# EAGLE board Week09_Aleduino(fabduino).brd (EAGLE 6.5.0)
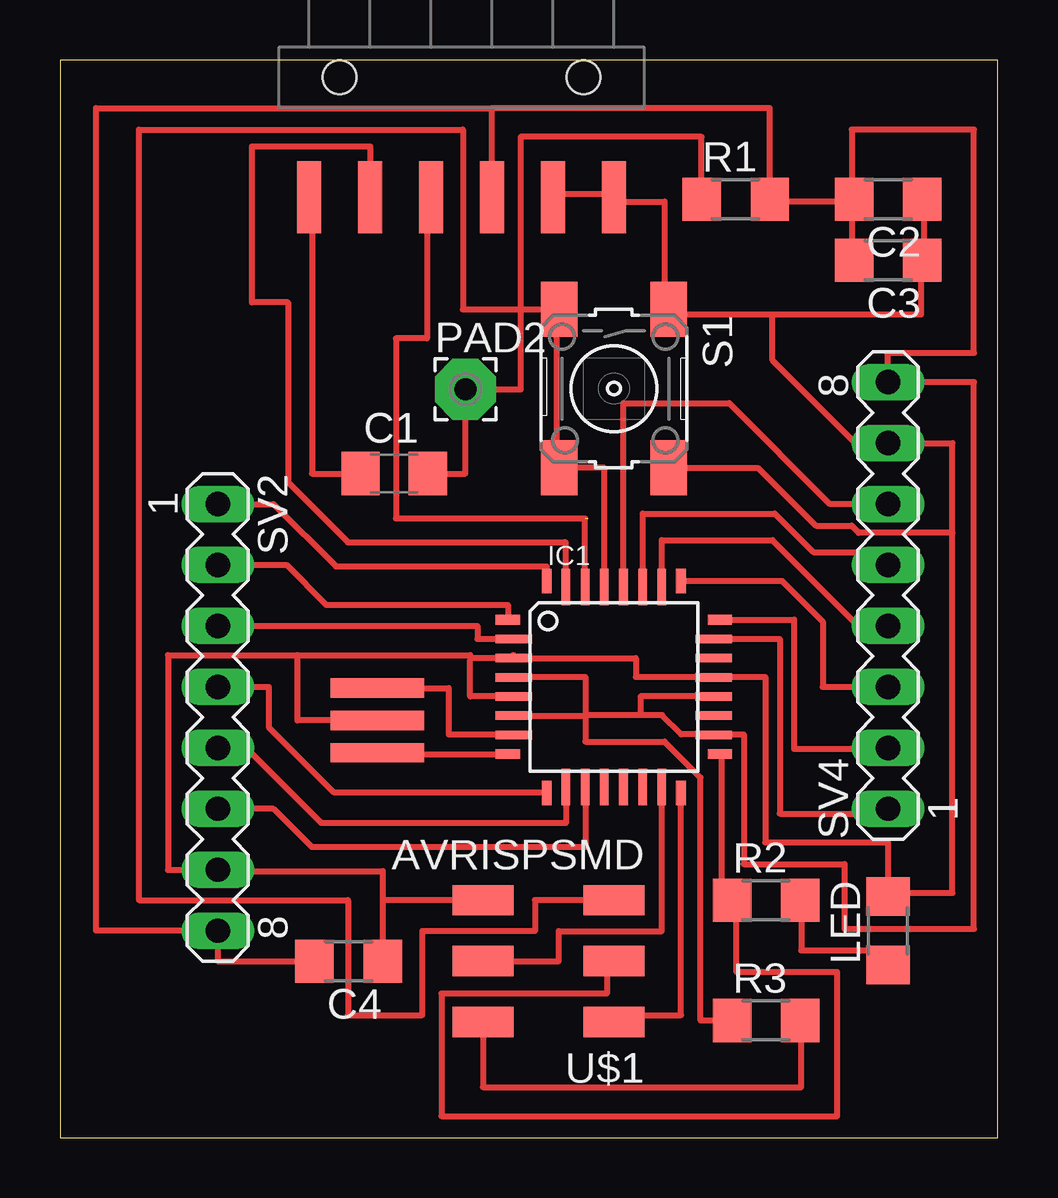
[diagram p0: board, top side]

Size 39.1 x 44.9 mm. Coordinates in mm from the lower left corner, seen from the top.
Outline: 0,0 39.1,0 39.1,44.9 0,44.9 0,0
Copper layers (1*16): Top 0.035mm / dielectric 1.5mm / Bottom 0.035mm
Design rules "default": minimum track width 10mil, minimum drill 24mil, track to track 8mil, track to pad 8mil, pad to pad 8mil, via to via 8mil, smd to smd 8mil, copper to edge 40mil, drill to drill 8mil, minimum pad ring 10mil, minimum via ring 8mil, stop-mask expansion 4mil, vias tented up to drill 0mil, thermal gap 10mil

## Footprints (pad centres in the part's own frame; a part is rotated, then mirrored left to right if it is on the bottom)
C1206 = smd 1.6 x 1.8: 1 -1.4,0; 2 1.4,0
1206 = smd 1.6 x 1.803: 1 -1.422,0; 2 1.422,0
TQFP32-08 = smd 1.016 x 0.406: 1 -4.42,2.8; 8 -4.42,-2.8; 17 4.42,-2.8; 24 4.42,2.8 | smd 1.524 x 0.356: 2 -4.166,2; 3 -4.166,1.2; 4 -4.166,0.4; 5 -4.166,-0.4; 6 -4.166,-1.2; 7 -4.166,-2; 18 4.166,-2; 19 4.166,-1.2; 20 4.166,-0.4; 21 4.166,0.4; 22 4.166,1.2; 23 4.166,2 | smd 0.406 x 1.016: 9 -2.8,-4.42; 16 2.8,-4.42; 25 2.8,4.42; 32 -2.8,4.42 | smd 0.356 x 1.524: 10 -2,-4.166; 11 -1.2,-4.166; 12 -0.4,-4.166; 13 0.4,-4.166; 14 1.2,-4.166; 15 2,-4.166; 26 2,4.166; 27 1.2,4.166; 28 0.4,4.166; 29 -0.4,4.166; 30 -1.2,4.166; 31 -2,4.166
1X06-SMD = smd 1 x 3: 1 -6.35,5; 2 -3.81,5; 3 -1.27,5; 4 1.27,5; 5 3.81,5; 6 6.35,5 | hole 1.4: -5.08,0; 5.08,0
2,54/0,9 = drill 0.914 pad 2.54 octagon: 1 0,0
6MM_SWITCH = smd 2.286 x 1.524: 1 -3.302,2.286; 2 3.302,2.286; 3 -3.302,-2.286; 4 3.302,-2.286
MA08-1 = drill 1.016 long: 1 -8.89,0; 2 -6.35,0; 3 -3.81,0; 4 -1.27,0; 5 1.27,0; 6 3.81,0; 7 6.35,0; 8 8.89,0
2X03SMD = smd 2.54 x 1.27: 1 -2.54,2.54; 2 2.92,2.54; 3 -2.54,0; 4 2.92,0; 5 -2.54,-2.54; 6 2.92,-2.54
EFOBM = smd 0.8 x 3.9: 1 -1.35,0; 2 0,0; 3 1.35,0

## Placement (x,y rotation side)
C1  .1uf  [C1206]  13.93,27.67 0 top
C2  1uf  [1206]  34.52,39.1 180 top
C3  .1uf  [1206]  34.52,36.56 180 top
C4  10uf  [1206]  12.03,7.35 180 top
IC1  ATMEGA48/88/168-AU  [TQFP32-08]  23.09,18.78 0 top
JP1  [1X06-SMD]  16.74,44.18 180 top
LED  [1206]  34.52,8.62 90 top
PAD2  WIREPAD2,54/0,9  [2,54/0,9]  16.9,31.18 0 top
R1  10k  [1206]  28.17,39.1 0 top
R2  499  [1206]  29.44,9.89 0 top
R3  10k  [1206]  29.44,4.88 0 top
S1  [6MM_SWITCH]  23.09,31.21 270 top
SV2  [MA08-1]  6.58,17.51 270 top
SV4  [MA08-1]  34.52,22.59 90 top
U$1  AVRISPSMD  [2X03SMD]  20.55,7.35 180 top
U$2  RESONATOREFOB  [EFOBM]  13.23,17.38 90 top

## Library data of the parts
C1 = rcl
C2-C4 LED R1-R3 S1 = ng
IC1 = atmega8
JP1 = SparkFun
PAD2 = wirepad
SV2 SV4 = con-lstb
U$1 = 01_fab
U$2 = fab

## Nets
DTR: C1.1 JP1.6
GND: C2.1 C3.1 C4.1 IC1.3 IC1.5 IC1.21 JP1.1 JP1.2 LED.2 S1.1 S1.2 SV2.7 SV4.7 U$1.6 U$2.2
MISO: IC1.16 U$1.1
MOSI: IC1.15 U$1.4
N$1: IC1.8 U$2.1
N$3: IC1.23 SV4.1
N$4: IC1.24 SV4.2
N$5: IC1.25 SV4.3
N$6: IC1.26 SV4.4
N$7: IC1.27 SV4.5
N$8: IC1.28 SV4.6
N$9: IC1.7 U$2.3
N$10: IC1.32 SV2.1
N$11: IC1.1 SV2.2
N$12: IC1.2 SV2.3
N$13: IC1.9 SV2.4
N$14: IC1.10 SV2.5
N$15: IC1.11 SV2.6
N$16: R3.2 U$1.2
N$23: LED.1 R2.2
RST: C1.2 IC1.29 PAD2.1 R1.1 S1.3 S1.4 U$1.5
RX: IC1.30 JP1.4
SCK: IC1.17 R2.1 U$1.3
TX: IC1.31 JP1.5
VCC: C2.2 C3.2 C4.2 IC1.4 IC1.6 IC1.18 IC1.20 JP1.3 R1.2 R3.1 SV2.8 SV4.8

## Tracks (layer width: path | path; a pad name or v marks a point on that pad's centre or on a via)
DTR
  Top 0.254: JP1.6 10.5,39 10.5,27.67 C1.1
GND
  Top 0.254: 37.2,25.2 33.3,25.2 33,25.5 31.5,25.5 29.09,27.91 S1.2 | C3.1 36,36.6 36,39 C2.1 | 25.2,34.3 25.2,39 23.1,39 JP1.1 22.8,39.3 20.7,39.3 JP1.2 | S1.1 25.2,33.6 25.2,34.3 | 35.7,36.3 C3.1 | 18.9,20.1 IC1.3 | 34.5,10.2 LED.2 | LED.2 34.8,10.2 37.2,10.2 37.2,25.2 | 37.2,25.2 37.2,28.94 SV4.7 33.16,28.94 29.7,32.4 29.7,34.3 | IC1.3 24,19.98 24,19.2 27.26,19.2 IC1.21 27.3,19.2 29.4,19.2 29.4,12.3 34.52,12.3 LED.2 | 9.9,20.1 4.5,20.1 4.5,11.16 SV2.7 6.64,11.1 13.45,11.1 13.45,9.89 | 9.9,20.1 17.1,20.1 17.1,19.98 | U$2.2 9.9,17.38 9.9,20.1 | IC1.5 17.1,18.38 17.1,19.9 17.1,19.98 | 25.2,34.3 29.7,34.3 | 29.7,34.3 35.9,34.3 35.9,36.56 C3.1 | U$1.6 13.45,9.89 | 13.45,9.89 C4.1 | IC1.3 17.1,19.98
MISO
  Top 0.254: U$1.1 23.1,5.1 25.89,5.1 IC1.16
MOSI
  Top 0.254: U$1.4 20.8,7.35 20.8,8.6 25.09,8.6 IC1.15
N$1
  Top 0.254: 18.67,15.9 IC1.8 12.93,15.98 U$2.1
N$3
  Top 0.254: IC1.23 30,20.78 30,13.5 34.52,13.5 SV4.1
N$4
  Top 0.254: IC1.24 30.6,21.58 30.6,16.2 34.52,16.2 SV4.2
N$5
  Top 0.254: 34.52,18.8 SV4.3 31.8,18.78 31.8,21.5 30.1,23.2 IC1.25
N$6
  Top 0.254: IC1.26 25.09,24.9 29.7,24.9 33.2,21.4 34.44,21.4 SV4.4
N$7
  Top 0.254: IC1.27 24.3,23.1 24.3,26 29.8,26 31.4,24.4 33.98,24.4 SV4.5
N$8
  Top 0.254: SV4.6 32.1,26.4 27.9,30.6 23.49,30.6 IC1.28
N$9
  Top 0.254: 18.9,16.8 IC1.7 18.92,16.8 16.2,16.8 16.2,18.73 U$2.3
N$10
  Top 0.254: IC1.32 20.29,23.8 11.5,23.8 8.9,26.4 SV2.1
N$11
  Top 0.254: 18.6,21.6 IC1.1 | SV2.2 9.44,23.86 11.1,22.2 18.67,22.2 IC1.1 | 18.67,21.6 IC1.1 | 18.65,21.6 IC1.1
N$12
  Top 0.254: SV2.3 17.4,21.32 17.4,20.78 IC1.2
N$13
  Top 0.254: SV2.4 8.7,18.78 8.7,17.1 11.4,14.4 20.25,14.4 IC1.9
N$14
  Top 0.254: SV2.5 7.76,16.24 10.9,13.1 21.09,13.1 IC1.10
N$15
  Top 0.254: IC1.11 21.9,14.4 21.9,12.1 10.5,12.1 8.9,13.7 SV2.6
N$16
  Top 0.254: U$1.2 17.63,2.1 30.9,2.1 30.9,4.88 R3.2
N$23
  Top 0.254: 34.2,7.2 34.5,7.2 LED.1 34.2,7.2 34.2,7.8 30.9,7.8 30.9,9.6 R2.2
RST
  Top 0.254: 26.7,39.3 R1.1 26.75,41.7 19.2,41.7 19.2,34.51 | 20.7,33.6 S1.3 | S1.3 20.7,33.3 20.7,27 S1.4 22.69,27.91 IC1.29 | 20.8,33.6 S1.3 | C1.2 16.9,27.67 PAD2.1 19.2,31.18 19.2,34.51 | U$1.5 19.8,9.89 19.8,8.6 15.1,8.6 15.1,5.1 12,5.1 12,9.9 3.3,9.9 3.3,42 16.8,42 16.8,34.51 19.2,34.51 | 19.2,34.51 S1.3
RX  (1 unrouted)
  Top 0.254: 21.9,23.1 IC1.30 21.89,25.8 14,25.8 14,33.3 15.3,33.3 15.3,39 JP1.4
SCK
  Top 0.254: IC1.17 27.6,15.9 27.6,9.9 27.9,9.9 R2.1 | U$1.3 22.8,7.2 22.8,6 15.9,6 15.9,0.9 32.4,0.9 32.4,6.9 28.2,6.9 28.2,9.89 R2.1 | 28.2,9.6 R2.1
TX
  Top 0.254: 12.9,39.3 JP1.5 12.93,41.3 8,41.3 8,34.8 9.5,34.8 9.5,27.3 12,24.8 20.7,24.8 21,24.8 21.09,24.8 IC1.31
VCC
  Top 0.254: 27,16.8 IC1.18 | IC1.4 19.2,19.2 21.9,19.2 21.9,17.6 | 33,39 33,36.6 C3.2 | 33,39 29.7,39 R1.2 | 33,39 C2.2 33,39.1 33,42 38.1,42 38.1,32.7 34.52,32.7 SV4.8 38.1,31.48 38.1,8.7 32.7,8.7 32.7,11.4 28.5,11.4 28.5,16.8 27.3,16.8 IC1.18 | JP1.3 18.3,39.3 18,39.3 18,42.9 | 29.4,39.3 R1.2 | R1.2 29.59,42.9 18,42.9 | 18,42.9 1.5,42.9 1.5,8.62 SV2.8 6.58,7.35 C4.2 | 27,16.8 27.26,16.8 IC1.18 | 21.9,17.58 21.9,16.5 25.2,16.5 26.7,15 26.7,4.88 R3.1 | IC1.6 21.9,17.58 | IC1.20 24.2,18.38 24.2,17.6 | 24.2,17.6 21.9,17.6 | 21.9,17.6 21.9,17.58 | 24.2,17.6 25.1,17.6 25.9,16.8 27,16.8